# Altium PCB Reflex_InterfaceBoard_RevF_201603.PcbDoc
Units mil, origin at the board's own origin, x right, y up, seen from the top; angles counter-clockwise.
Board outline 4826.89 x 3773.99 mil, 4 copper layers (Top, Signal Layer 1, Signal Layer 2, Bottom), stack 61.2 mil thick; 34 components, 31 nets, 156 pads, 115 vias.
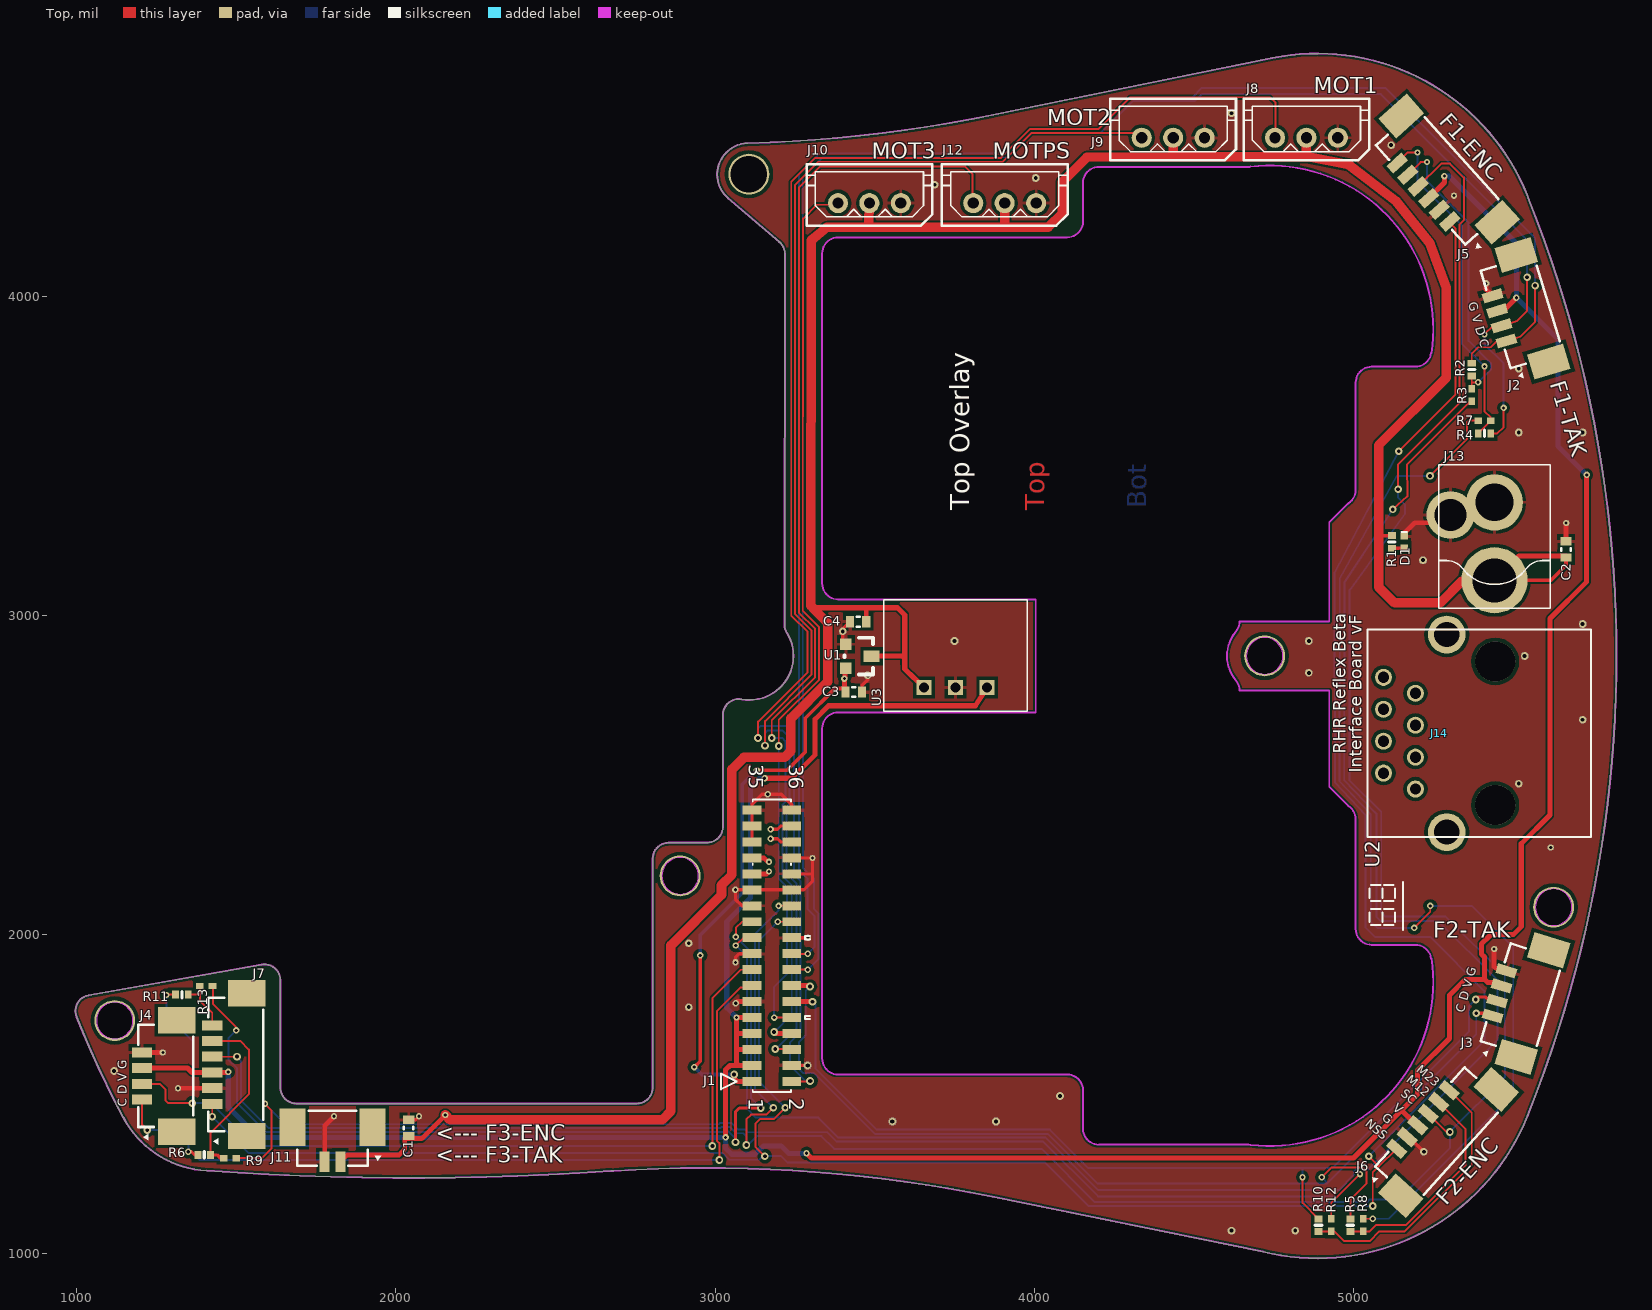
[diagram p0: Top view]
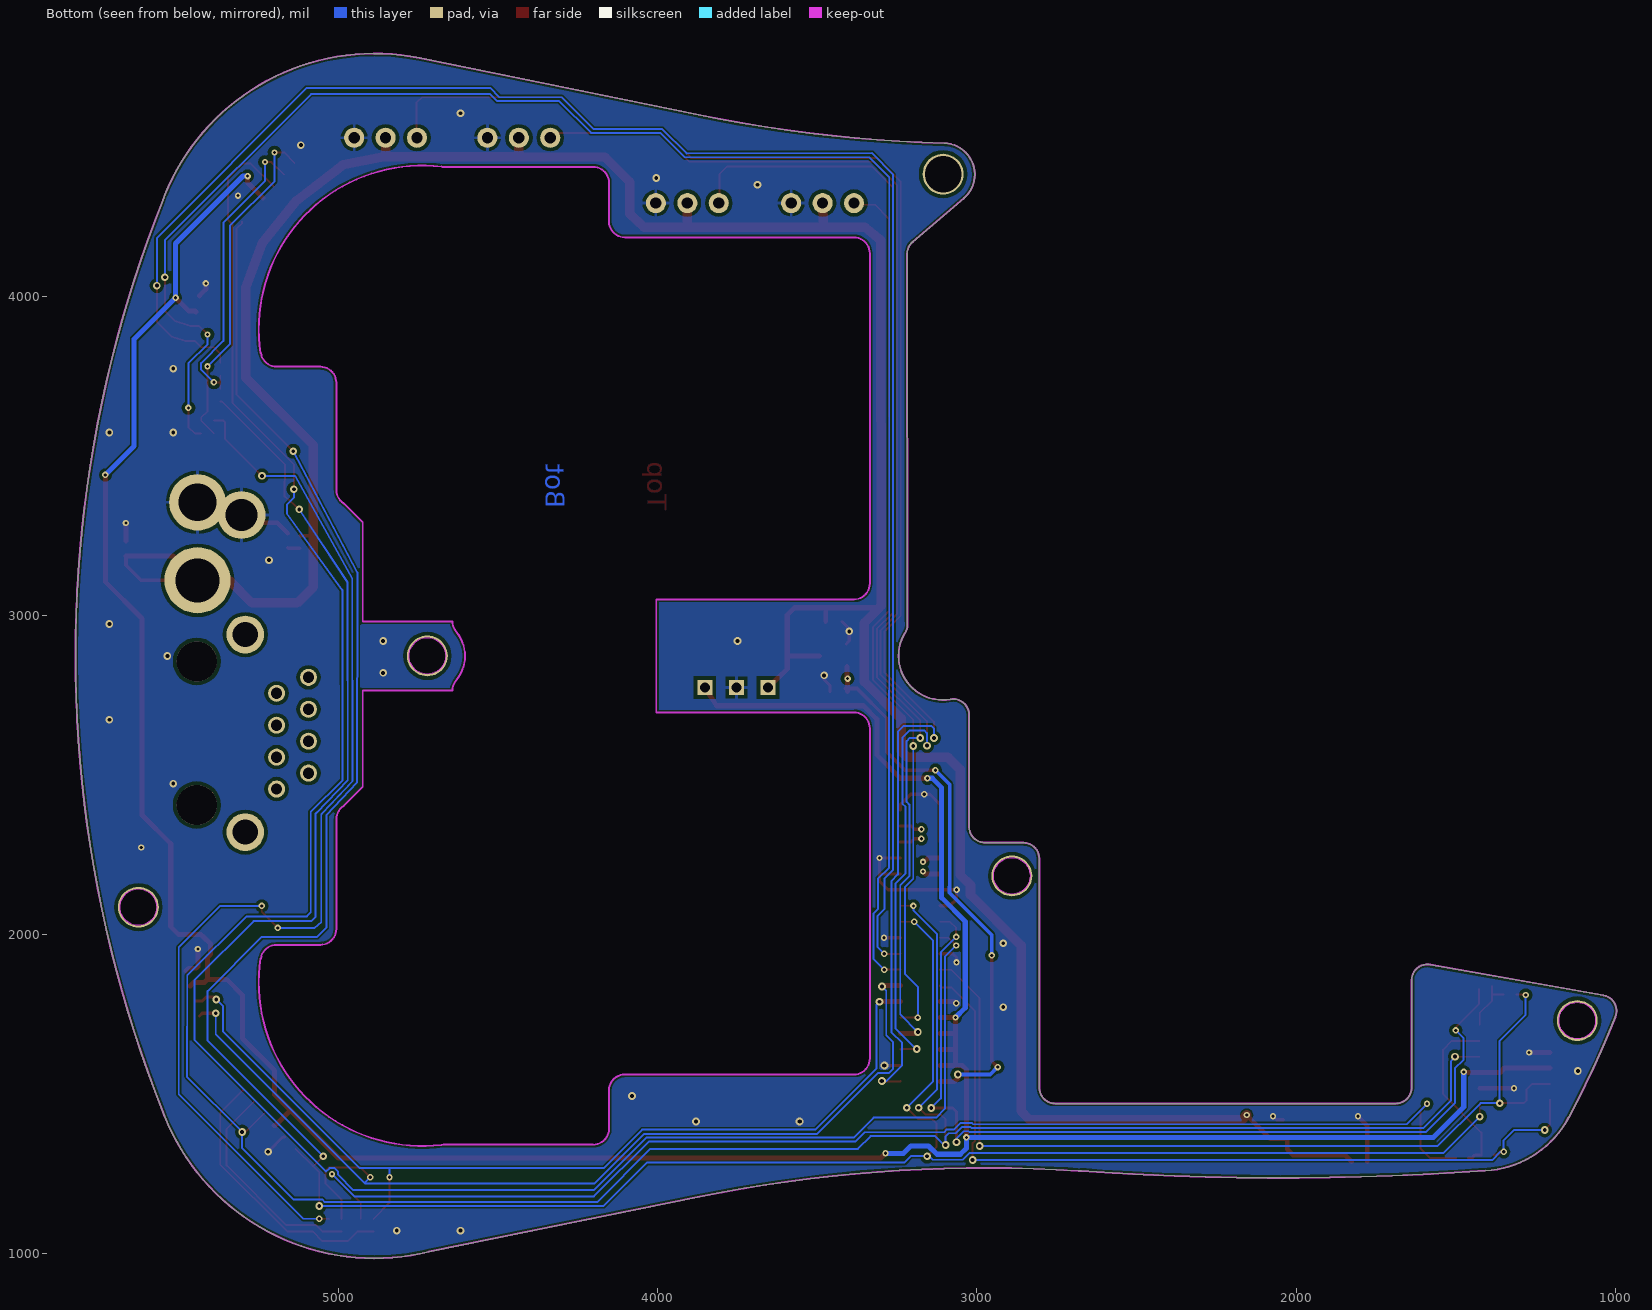
[diagram p1: Bottom view, seen from below]
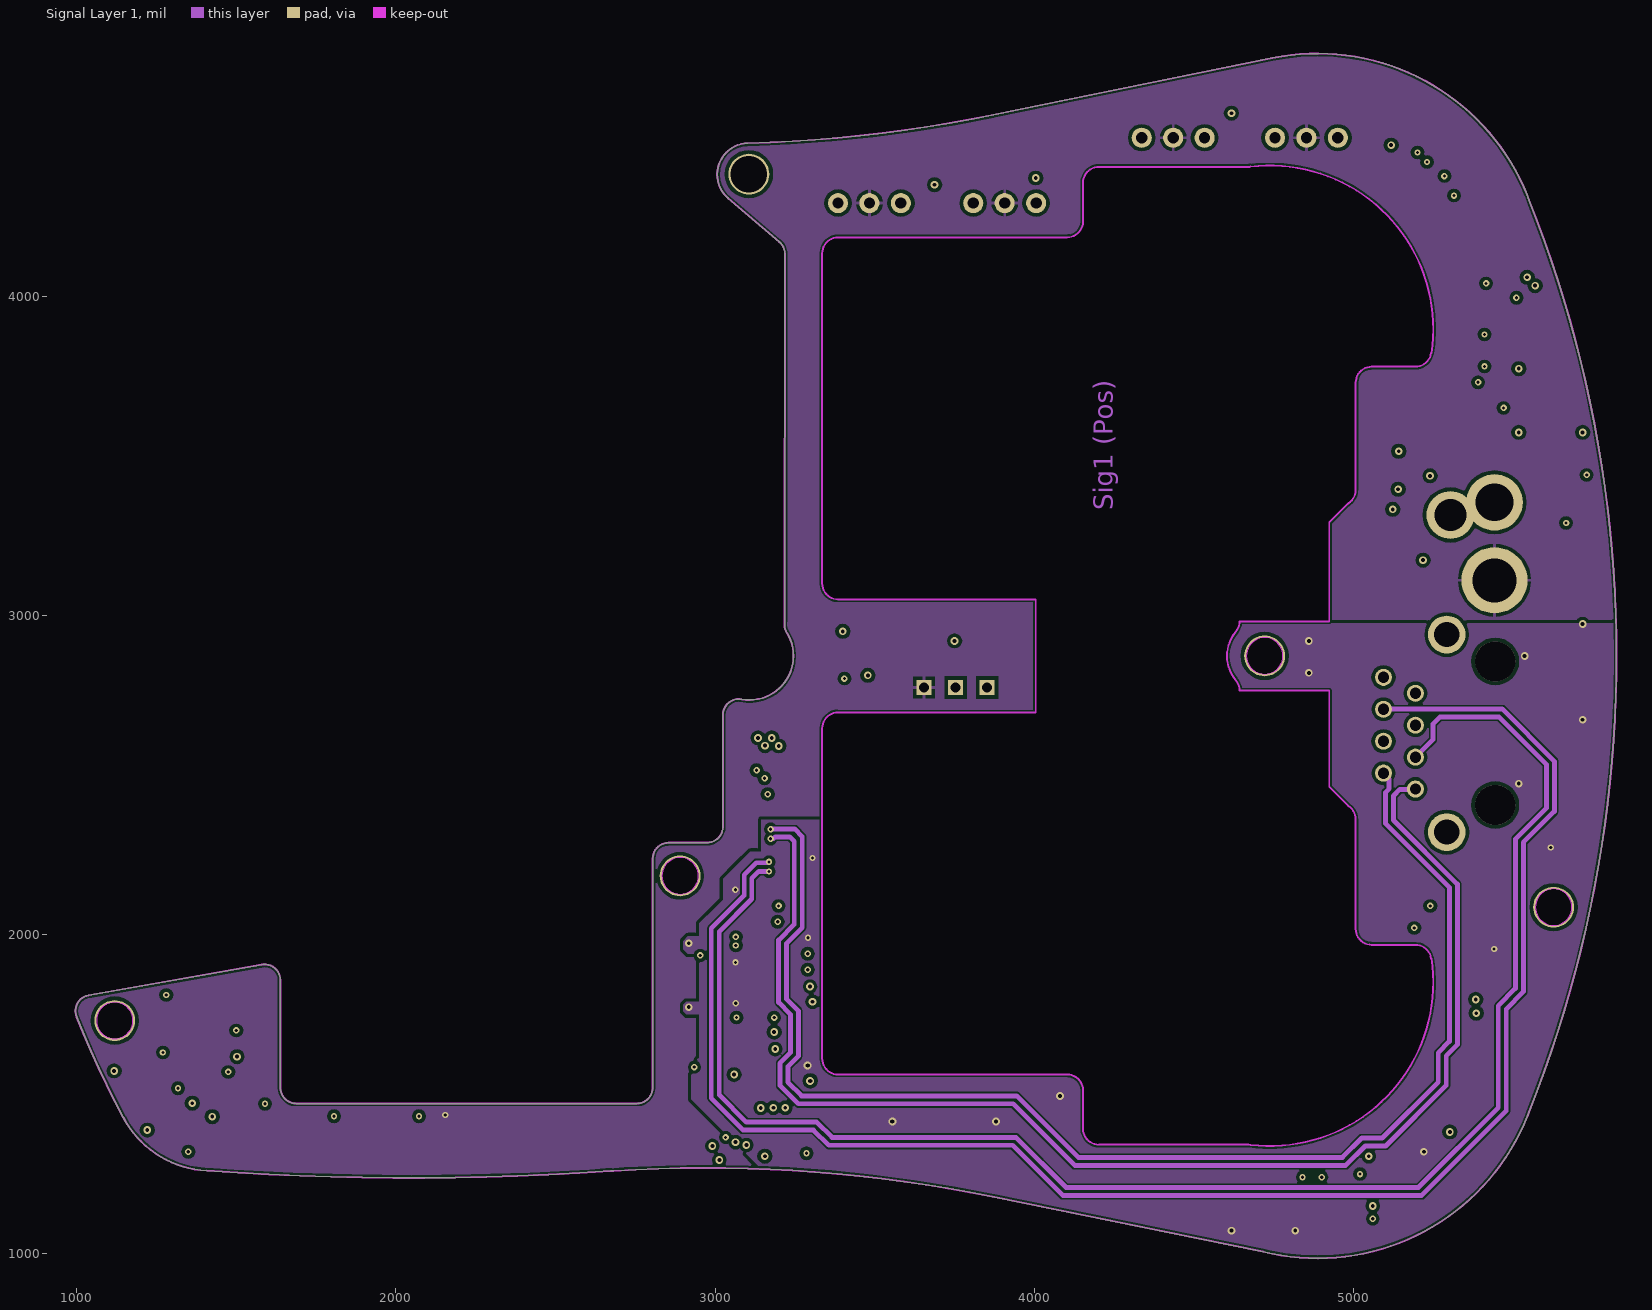
[diagram p2: Signal Layer 1]
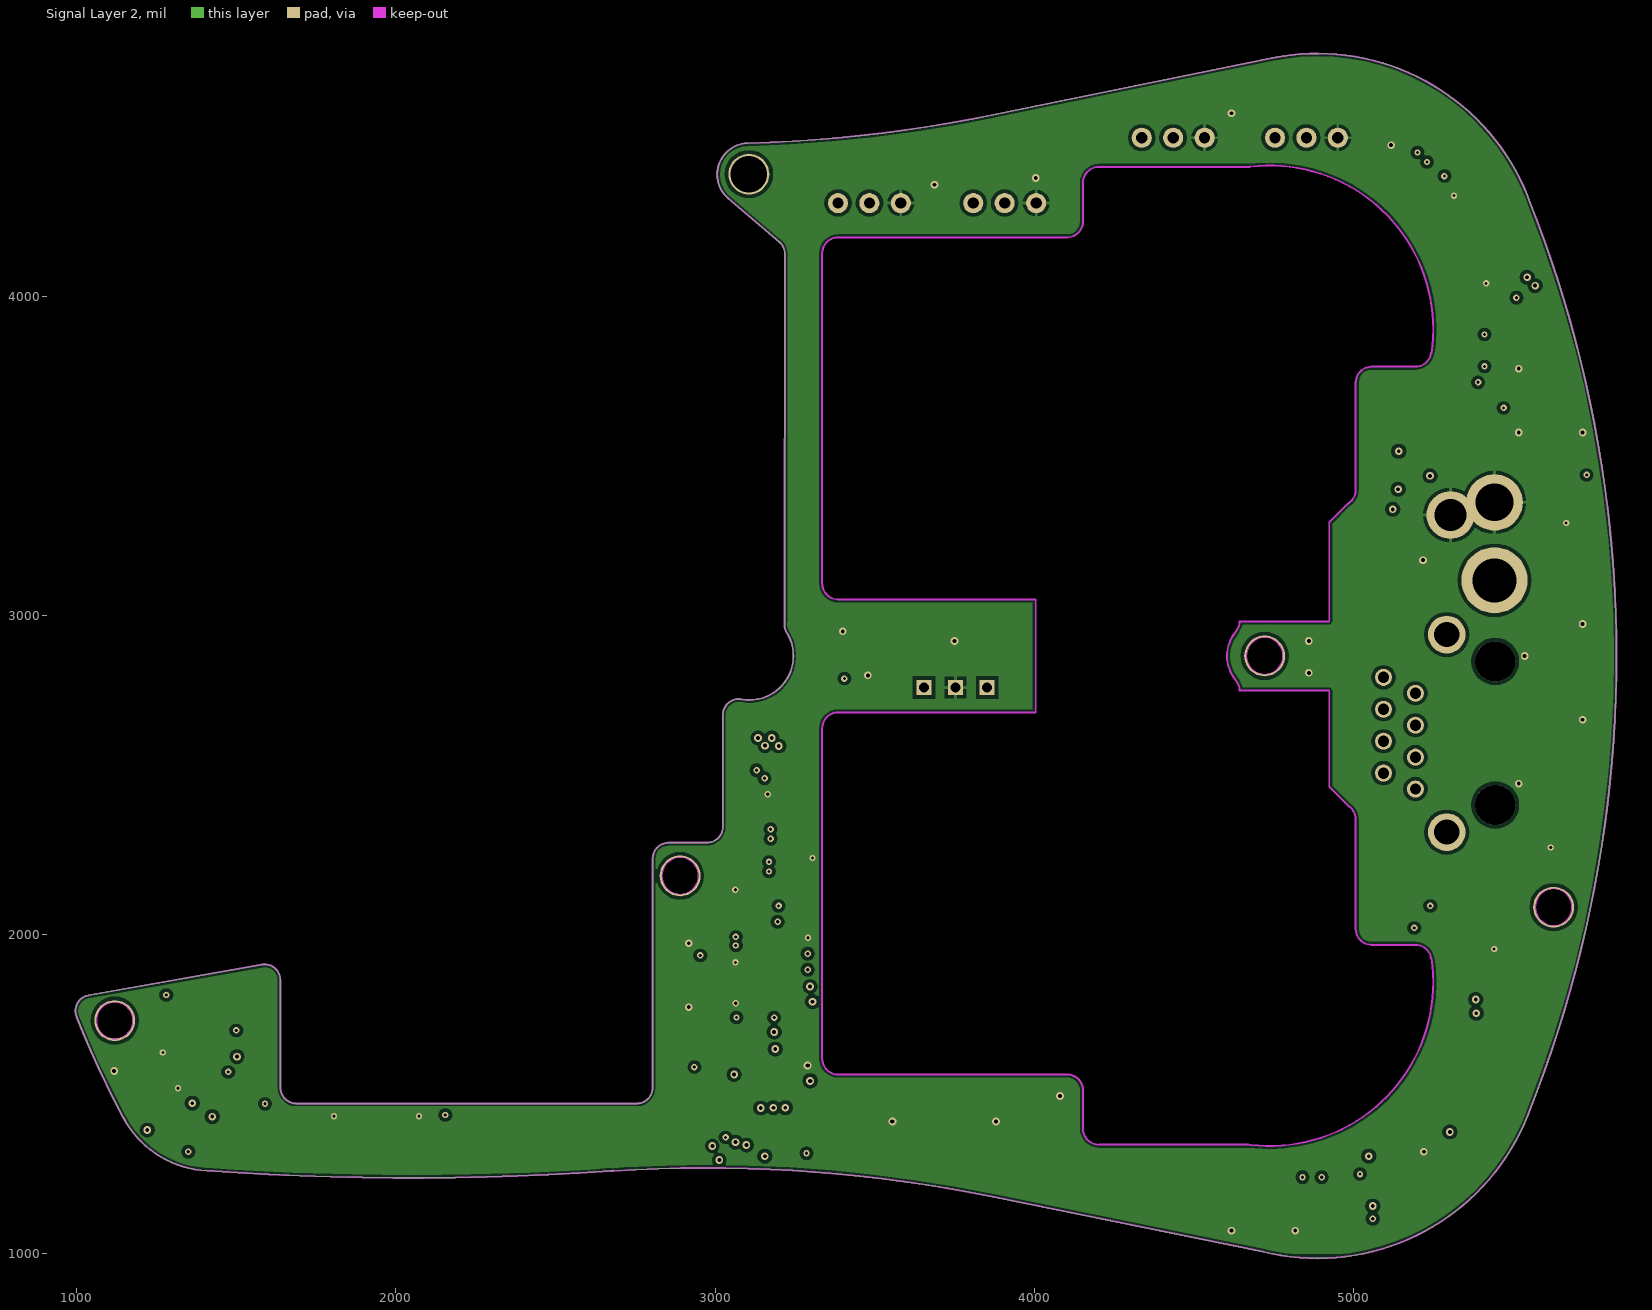
[diagram p3: Signal Layer 2]

## Layer stack, top to bottom
Top Solder: solder mask 0.4, Solder Resist, Dk 3.5
Top: signal copper 1.4
Dielectric 1: core 25, FR-4, Dk 4.8
Signal Layer 1: signal copper 1.417
Dielectric 3: prepreg 20.566, Dk 4.2
Signal Layer 2: signal copper 1.417
Dielectric 2: core 10, Dk 4.2
Bottom: signal copper 1.4
Bottom Solder: solder mask 0.4, Solder Resist, Dk 3.5

## Board outline
1146.61,1426.65 ccw(c1424.49,1575.02) 1407.69,1260.46 1407.72,1260.99 ccw(c2049.51,10214.05) 2673.2,1259.71 2682.03,1259.71 2682.09,1259.65 cw(c2975.08,-3209.35) 3867.87,1179.36 3867.95,1179.73 4716.04,1007.2 4715.95,1006.83 ccw(c4886.49,1695.01) 5544.22,1430.31 5549.54,1445.18 ccw(c1965.49,2873.02) 5548.87,4302.55 5548.86,4302.55 5543.86,4316.61 ccw(c4886.49,4051.02) 4746.35,4746.03 4746.48,4746.01 3871.92,4568.1 3872.82,4568.1 cw(c2977.15,8935.93) 3101.65,4478.95 ccw(c3104.65,4380.95) 3041.01,4306.37 3040.65,4305.95 3200.65,4169.95 3200.86,4170.2 cw(c3168.65,4131.96) 3218.65,4131.95 3218.65,4132.25 3217.66,2980 3217.48,2979.82 3217.48,2971.01 ccw(c3267.47,2971.02) 3224.85,2944.89 3225.15,2945.12 cw(c3107.48,2873.01) 3083.52,2737.11 3083.17,2737.25 ccw(c3074.48,2688.01) 3024.48,2688.01 3024.48,2338.01 cw(c2974.48,2338.01) 2974.48,2288.01 2854.48,2288.01 ccw(c2854.48,2238.01) 2804.48,2238.01 2804.48,1521.01 cw(c2754.48,1521.01) 2754.48,1471.01 1688.48,1471.01 cw(c1688.48,1521.01) 1638.48,1521.01 1638.48,1857.01 ccw(c1588.48,1857.01) 1579.8,1906.25 1580.48,1906.01 1037.48,1810.01 1037.8,1810.25 ccw(c1046.48,1761.02) 1000,1742.61 1000.14,1742.5 ccw(c3855.42,2873)
cut-out: 3335.48,1612.01 3335.48,2646.01 cw(c3385.48,2646.01) 3385.48,2696.01 4004.48,2696.01 4004.48,3050.01 3385.48,3050.01 cw(c3385.48,3100.01) 3335.48,3100.01 3335.48,4134.01 cw(c3385.48,4134.01) 3385.48,4184.01 4102.48,4184.01 ccw(c4102.48,4234.01) 4152.48,4234.01 4152.48,4355.01 cw(c4202.48,4355.01) 4202.48,4405.01 4670.48,4405.01 ccw(c4670.41,4455.01) 4676.4,4405.37 4676.86,4405.41 cw(c4737.49,3897.01) 5243.86,3821.34 5242.94,3821.62 cw(c5193.48,3829.02) 5193.48,3779.01 5056.48,3779.01 ccw(c5056.48,3729.01) 5006.48,3729.01 5006.48,3393.01 cw(c4956.49,3393) 4983.72,3351.08 4983.65,3351.25 4923.65,3291.25 4923.65,2981.25 4642.65,2981.25 4642.48,2981.01 cw(c4592.48,2981) 4630.79,2948.87 4631.09,2948.86 ccw(c4721.48,2873.01) 4630.96,2797.32 4630.79,2797.15 cw(c4592.48,2765.02) 4642.48,2765.01 4642.65,2764.25 4923.65,2764.25 4923.65,2463.25 4983.65,2403.25 4983.72,2402.95 cw(c4956.48,2361.02) 5006.48,2361.01 5006.48,2018.01 ccw(c5056.48,2018.01) 5056.48,1968.01 5193.48,1968.01 cw(c5193.48,1918) 5242.94,1925.4 5243.86,1925.69 cw(c4737.49,1850.02) 4676.86,1341.62 4676.4,1341.66 ccw(c4670.49,1292.01) 4670.48,1342.01 4202.48,1342.01 cw(c4202.48,1392.01) 4152.48,1392.01 4152.48,1512.01 ccw(c4102.48,1512.01) 4102.48,1562.01 3385.48,1562.01 cw(c3385.48,1612.01)
cut-out: 5683.48,2086.01 ccw(c5626.48,2086.01) 5569.48,2086.01 ccw(c5626.48,2086.01)
cut-out: 2947.48,2184.01 ccw(c2890.48,2184.01) 2833.48,2184.01 ccw(c2890.48,2184.01)
cut-out: 4778.48,2873.01 ccw(c4721.48,2873.01) 4664.48,2873.01 ccw(c4721.48,2873.01)
cut-out: 1176.48,1731.01 ccw(c1119.48,1731.01) 1062.48,1731.01 ccw(c1119.48,1731.01)

## Design rules (kind name [scope] priority, off if disabled: settings)
Clearance [All] p1: gap=6 except(11: SMDPad-Poly THPad-Poly Via-Poly Fill-Poly Poly-Poly)
Clearance "Clearance (Same Net)" [All] p2: gap=0
ComponentClearance ComponentClearance_Except [InComponent('J13') vs InComponent('J14')] p1: gap=0 collisioncheckmode=3 verticalgap=0 showdistances=FALSE
ComponentClearance [All] p2: gap=10 collisioncheckmode=3 verticalgap=10 showdistances=FALSE
DiffPairsRouting [All] p1: maxlimit=10 minlimit=6 mostfreqgap=10 toplayer_minwidth=10 toplayer_maxwidth=15 toplayer_prefwidth=15 midlayer1_minwidth=10 midlayer1_maxwidth=15 midlayer1_prefwidth=15 midlayer2_minwidth=10 midlayer2_maxwidth=15 midlayer2_prefwidth=15 bottomlayer_minwidth=10 bottomlayer_maxwidth=15 bottomlayer_prefwidth=15 maxuncoupledlength=500
HoleSize [All] p1: absolutevalues=TRUE maxlimit=150 minlimit=6 maxpercent=80.000 minpercent=20.000
HoleToHoleClearance mdViaViaSameLayer [All] p1: gap=8 allowstackedmicrovias=TRUE
HoleToHoleClearance [All] p2: gap=10 allowstackedmicrovias=TRUE
MinimumAnnularRing [All] p1: minimumring=5
MinimumSolderMaskSliver [All] p1: minsoldermaskwidth=2
PasteMaskExpansion mlMinCreamFrame [All] p1: expansion=0
PasteMaskExpansion [All] p2: expansion=0
PolygonConnect ThermalVias [IsVia] p1: connectstyle=Direct reliefconductorwidth=10 reliefentries=4 polygonreliefangle="90 Angle" airgapwidth=10
PolygonConnect [All] p2: connectstyle=Relief reliefconductorwidth=10 reliefentries=4 polygonreliefangle="90 Angle" airgapwidth=10
RoutingVias [All] p1: holewidth=10 width=20 viastyle="Through Hole" minholewidth=6 minwidth=16 maxholewidth=28 maxwidth=48
SilkToSilkClearance [All] p1 off: silktosilkclearance=10
SilkToSolderMaskClearance [IsPad] p1 off: minsilkscreentomaskgap=10 clearancetoexposedcopper=TRUE
SolderMaskExpansion mlMinStopFrame [All] p1: expansion=2
SolderMaskExpansion [All] p2: expansion=4
Width Width_1 [All] p1: maxlimit=100000 minlimit=6 preferedwidth=10
Width [All] p2: maxlimit=10 minlimit=10 preferedwidth=10
22 further rules are at their usual default settings.

## Classes and differential pairs
differential pair ETH_TX: +ETH_TX_P -ETH_TX_N
differential pair ETH_RX: +ETH_RX_P -ETH_RX_N

## Components (designator, comment, footprint, x,y, rotation, side; value= is the part's Value field where it differs from the comment)
C1 "Cap_0603_10uF" GENERIC_0603 2040,1420 r270 top
C2 "0.1uF 25V" Generic_0603 5665.5,3232.01 r270 top
C3 "1u" Generic_0603 3460,2760 r180 top
C4 "1u" Generic_0603 3473.46,2980 r180 top
D1 "LED White" 0402_LED_WHITE 5158.68,3230 r0 top
J1 "CLP-118-02-F-D" SAMTEC_CLP-118-02-F-D 3177.86,1865.39 r270 top locked
J2 "53398-0471" 53398-0410 5456.75,3930.19 r287 top
J3 "53398-0471" 53398-0410 5456.75,1815.84 r253 top
J4 "53398-0471" 53398-0410 1205.14,1557.36 r270 top
J5 "53398-0671" 53398-0610 5219.22,4325.27 r312 top locked
J6 "53398-0671" 53398-0610 5216.76,1420.89 r228 top
J7 "53398-0671" 53398-0610 1425.01,1593.05 r270 top
J8 "0022035035" 0022035035 4852.3,4496.2 r180 top
J9 "0022035035" 0022035035 4434.8,4496.08 r180 top
J10 "0022035035" 0022035035 3483.43,4291.49 r180 top
J11 "53398-0210" 53398-0210 1801.61,1288.65 r0 top
J12 "0022035035" 0022035035 3907.11,4291.49 r180 top
J13 "BRLJCK(DK:CP-044AH-ND)" BRLJCK(DK:CP-044AH-ND) 5441.36,3271.94 r180 top
J14 "" STEWART-CONNECTOR-SS-7188VS-A-NF-50 5443.64,2405.94 r90 top
R1 "3K" Generic_0402 5120,3230 r90 top
R2 "Res_0402_DNP" Generic_0402 5370,3770 r270 top
R3 "Res_0402_0" 0402 5370,3690 r90 top
R4 "Res_0402_DNP" Generic_0402 5410,3570 r180 top
R5 "Res_0402_DNP" Generic_0402 4990,1090 r270 top
R6 "Res_0402_DNP" Generic_0402 1400,1310 r0 top
R7 "Res_0402_0" 0402 5410,3610 r0 top
R8 "Res_0402_0" 0402 5030,1090 r270 top
R9 "Res_0402_0" 0402 1480,1300 r180 top
R10 "Res_0402_DNP" Generic_0402 4890,1090 r270 top
R11 "Res_0402_DNP" Generic_0402 1330,1812 r0 top
R12 "Res_0402_0" 0402 4930,1090 r270 top
R13 "Res_0402_0" 0402 1406,1839 r180 top
U1 "MCP1754ST-5002E/CB" SOT-23 3410,2910 r270 top
U3 "945-1394-5-ND(DIGIKEY)" 945-1394-5-ND(DIGIKEY) 3753.23,2874.21 r0 top locked

## Footprints (in the part's own frame and the unit in brackets; to place one, negate y for a bottom-side part, rotate by r counter-clockwise, add the part's x,y. Pads: shape width x height; smd on the part's side, far side on the other; paste and mask are expansions set on the pad)
0402 [mm] "Chip Capacitor, Body 1.0x0.5mm, IPC High Density"
  rect 0.6x0.5 smd: 1(-0.5,0) 2(0.5,0)
  body extent -0.55,-0.3 0.55,0.3, height 1.3
0402_LED_WHITE [mm] "White LED land pattern"
  rect 0.6x0.5 smd paste+0 mask+0: 1(0,-0.45) 2(0,0.45)
  silkscreen extent -0.2,0.8 0.2,0.8
945-1394-5-ND(DIGIKEY) [mil] "945-1394-5-ND(DIGIKEY)"
  rect 47.25x47.25 hole 31.5: GND(0,-100) VIN(-99,-100) VOUT(99,-100)
  silkscreen extent -225,-175 225,175
53398-0210 [mil] "53398-0210"
  rect 31.5x62.99 smd: 1(24.61,0) 2(-24.61,0)
  rect 82.68x118.11 smd: M1(125.39,108.27) M2(-125.39,108.27)
  silkscreen extent -111,-12 152,160, body extent -151,-8 151,158, height 185
53398-0410 [mil] "53398-0410"
  rect 31.5x62.99 smd: 1(73.82,0) 2(24.61,0) 3(-24.61,0) 4(-73.82,0)
  rect 82.68x118.11 smd: M1(174.61,108.27) M2(-174.61,108.27)
  silkscreen extent -160,-12 201,160, body extent -200,-3 200,163, height 185
53398-0610 [mil] "53398-0610"
  rect 31.5x62.99 smd: 1(123.03,0) 2(73.82,0) 3(24.61,0) 4(-24.61,0) 5(-73.82,0) 6(-123.03,0)
  rect 82.68x118.11 smd: M1(223.82,108.27) M2(-223.82,108.27)
  silkscreen extent -209,-12 251,160, body extent -249,-8 249,158, height 185
0022035035 [mil] "0022035035"
  round 62.99 hole 35.43: 1(98.43,0) 2(0,0) 3(-98.43,0)
  silkscreen extent -197,-122 197,71, body extent -195,-123 195,70, height 232
BRLJCK(DK:CP-044AH-ND) [mil] "BRLJCK(DK:CP-044AH-ND)"
  round 207 hole 138: TERM1(0,162)
  round 177 hole 118: TERM2(0,-82)
  round 150 hole 100: TERM3(138,-42.5)
  silkscreen extent -175,-200 175,250
Generic_0402 [mm] "Chip Resistor, Body 1.0x0.5mm, IPC Medium Density"
  rect 0.55x0.65 smd: 1(-0.5,0) 2(0.5,0)
  silkscreen extent 0,-0.25 0,0.25, body extent -0.52,-0.27 0.53,0.28, height 0.4
GENERIC_0603 [mm]
  rect 0.65x0.9 smd: 1(0,0) 2(1.3,0)
  silkscreen extent 0.53,-0.38 0.76,0.38, body extent -0.15,-0.4 1.45,0.4, height 0.35
Generic_0603 [mm]
  rect 0.65x0.9 smd: 1(0,0) 2(1.3,0)
  silkscreen extent 0.53,-0.38 0.76,0.38, body extent -0.15,-0.4 1.45,0.4, height 0.35
SAMTEC_CLP-118-02-F-D [mil] "SAMTEC_CLP-118-02-F-D"
  rect 28x59 smd mask+4: 1(325,-62) 2(325,62) 3(275,-62) 4(275,62) 5(225,-62) 6(225,62) 7(175,-62) 8(175,62) 9(125,-62) 10(125,62) 11(75,-62) 12(75,62) 13(25,-62) 14(25,62) 15(-25,-62) 16(-25,62) 17(-75,-62) 18(-75,62) 19(-125,-62) 20(-125,62) 21(-175,-62) 22(-175,62) 23(-225,-62) 24(-225,62) 25(-275,-62) 26(-275,62) 27(-325,-62) 28(-325,62) 29(-375,-62) 30(-375,62) 31(-425,-62) 32(-425,62) 33(-475,-62) 34(-475,62) 35(-525,-62) 36(-525,62)
  silkscreen extent -558,-160 358,120
SOT-23 [mil]
  rect 36x36 smd mask+0: 1(0,0) 2(75,0)
  rect 36x50 smd mask+0: 3(38,80)
  silkscreen extent -20,-5 95,85
STEWART-CONNECTOR-SS-7188VS-A-NF-50 [mm] "STEWART-CONNECTOR-SS-7188VS-A-NF-50"
  round 3.2 hole 3.2: 1(0,0) 1(11.43,0)
  round 1.35 hole 0.9: P$1(1.27,6.35) P$2(2.54,8.89) P$3(3.81,6.35) P$4(5.08,8.89) P$5(6.35,6.35) P$6(7.62,8.89) P$7(8.89,6.35) P$8(10.16,8.89)
  round 3 hole 2: P$9(-2.159,3.861) P$10(13.564,3.861)
  silkscreen extent -2.54,-7.62 13.97,10.16

## Part data
C1: "Capacitor"
C2: library part Cap_0603_0.1uF_25V, "Capacitor 0.1uF 0603 package"
C3 C4: library part Cap_0603_1uF, "Capacitor"
D1: library part LED_White_0402, "Surface mount LEDs"
J1: "SOCKET, 1.27MM, VERTICAL THT, 28WAY"
J2 J3 J4 J5 J6 J7: "HEADER"
J8 J9 J10 J12: library part MOLEX_0022035035, "CONN HEADER 3POS 2.5MM VERT TIN    Source:  http://www.digikey.com/product-detail/en/0022035035/WM18887-ND/403302 rfk_1850.pdf"
J11: library part 53398-0271, "HEADER"
J14: library part SS-7188VS-A-NF-50
R1: library part Res_0402_3.0K, "Resistor 3 Kohm"
R2 R4 R5 R6 R10 R11: "Resistor 0402 DNP"
R3 R7 R8 R9 R12 R13: "Resistor 0 ohm"
U1: library part LM50, "SOT-23 Single-Supply Centigrade Temperature Sensor   Vout = (10mV/°C x Temp °C) +5mmmV Source: http://cache.national.com/ds/LM/LM50.pdf"

## Free pads (board coordinates)
  round 128 hole 114: 1(1119.48,1731.01) 1(2890.48,2184.01) 1(3106,4382) 1(4721.48,2873.01) 1(5626.48,2086.01)

## Via types
v1: diameter 24/24/24/24 (per signal layer), hole 12, Top to Bottom, tented both sides, 55 vias
v2: diameter 20, hole 10, Top to Bottom, tented both sides, 54 vias
v3: diameter 25/25/25/25 (per signal layer), hole 13, Top to Bottom, tented both sides, 5 vias
v4: diameter 20/20/20/20 (per signal layer), hole 10, Top to Bottom, tented both sides, 1 vias

## Nets (pads, with @x,y where several pads share a name; then routed paths per layer and width w, separated by ;. In a path a pad name is that pad's centre, name@x,y a point inside that pad or via, vN(x,y) a via of type N, cw(c..) or ccw(c..) an arc to the next point about the centre after c; other vN are vias at no path point)
3V3: J1.3 J1.5 J1.7 J1.9 J2.3 J3.3 J4.3 J5.3 J6.3 J7.3 U3.VOUT | length 10284.8
  Top w16: J4.3 1347.53,1581.97 1361.48,1568.01 1424.59,1568.01 J7.3 1473.44,1568.44 v2(1475,1570) ; v2@1473.48,1568.01 v2@1475.11,1568.1 ; v2(3032.99,1365.01) 3032.99,1576.99 3046.39,1590.39 3073.61,1590.39 ; 3068.39,1690.39 J1.7 ; 3069.61,1640.39 J1.5 ; J1.3 3073.61,1590.39 ; J1.9 v2(3067,1740.39) 3067,1597 3073.61,1590.39 ; v2(3155,2490) 3240,2490 3313.48,2563.48 3313.48,2675.01 3355.48,2717.01 3815.67,2717.01 U3.VOUT ; v2(3286.47,1315) 3301.47,1300 5000,1300 5150,1450 ; J6.3@5200.9,1402.6 J6.3 5197.4,1402.6 5150,1450 ; J5.3 5284.48,4355.78 v2(5284.48,4376.01) ; J2.3@5445.83,3950 J2.3 5468.72,3953.72 v2(5510,3995) ; J3.3 5453.32,1850 5420,1850 5410,1860 ; v2(5730,3440) 5730,3105 5615,2990 5615,2375 5525,2285 5525,2025 5500,2000 5430,2000 5424,1994 5423.85,1994 5401,1971.15 5401,1938.85 5410,1929.85 5410,1860 ; 5150,1450 5200,1500 5200,1575 5300,1675 5300,1810 5350,1860 5410,1860
  Bottom w16: v2(1475,1570) 1475,1460 1570,1365 v2(3032.99,1365.01) 3032.99,1331.05 3052.04,1312 3125.23,1312 3151.23,1338 3206.85,1338 3229.85,1315 v2(3286.47,1315) ; v2(3067,1740.39) 3036.48,1770.91 3036.48,2041.48 3110.48,2115.48 3110.48,2460.48 3140,2490 v2(3155,2490) ; v2(5284.48,4376.01) 5298.99,4376.01 5510,4165 v2(5510,3995) 5640,3865 5640,3530 v2(5730,3440)
5V: C3.2 J1.1 U1.2 | length 1868.3
  Top w12: v2(2935,1585) 2953.48,1603.48 v2(2953.48,1935) ; v1(3059.48,1561.75) 3059.48,1550.52 3059.48,1547.75 3066.48,1540.75 3115.5,1540.75 J1.1 ; v2(3130,2515) 3225,2515 3282.48,2572.48 3282.48,2678.01 3375.91,2771.44 C3.2@3411.57,2771.44 ; C3.2@3406.56,2776.45 U1.2@3406.56,2835.8
  Top w15: C3.2@3405,2761.54 v2(3405,2801.9) 3406.55,2803.45 U1.2@3406.55,2840.8
  Top w16: v1@3059.48,1550.52 3069.61,1540.39 J1.1
  Bottom w12: v2(2935,1585) 2958.25,1561.75 v1(3059.48,1561.75) ; v2(2953.48,1935) 2953.48,1998.48 3085,2130 3085,2130.67 3085.61,2131.28 3085.61,2149.5 3085,2150.11 3085,2470 v2(3130,2515)
ETH_RX_N: J1.34 J14.P$2 | length 4314.4
  Top w10: v2(3174,2330.39) 3195.36,2330.39 3205.36,2340.39 J1.34
  Top w16: J14.P$2 J14.P$2@5098.65,2500.94
  Signal Layer 1 w15: v2(3174,2330.39) 3174.61,2331 3249,2331 3273,2307 3273,2021.64 3224,1972.64 3224,1798 3261,1761 3261,1619.64 3228,1586.64 3228,1538 3271,1495 3944.36,1495 4137.36,1302 4965,1302 5026,1363 5090,1363 5265,1538 5265,1630.36 5300,1665.36 5300,2148 5100,2348 5100,2445.36 5111.32,2456.68 5111.32,2488.26 J14.P$2
ETH_RX_P: J1.32 J14.P$1 | length 4342.4
  Top w10: v2(3174,2300.39) 3195.36,2300.39 3205.36,2290.39 J1.32
  Signal Layer 1 w15: v2(3174,2300.39) 3182.89,2300.39 3188.5,2306 3234,2306 3248,2292 3248,2032 3199,1983 3199,1787.64 3236,1750.64 3236,1630 3203,1597 3203,1527.64 3260.64,1470 3934,1470 4127,1277 4975.36,1277 5036.36,1338 5100.36,1338 5290,1527.64 5290,1620 5325,1655 5325,2158.36 5125,2358.36 5125,2435 5145,2455 5192.7,2455 J14.P$1
ETH_TX_N: J1.29 J14.P$6 | length 5384.3
  Top w15: J1.29 3152.86,2240.39 3165.36,2227.89 v2(3169,2227.89)
  Top w16: J14.P$6 J14.P$6@5095.34,2704.25
  Signal Layer 1 w15: v2@3169,2225 3128.64,2225 3091,2187.36 3091,2123 2988,2020 2988,1487.64 3087.64,1388 3308,1388 3356,1340 3932,1340 4089,1183 5213.36,1183 5478,1447.64 5478,1767 5532,1821 5532,2289 5629,2386 5629,2543.36 5465.36,2707 5094.7,2707 J14.P$6
ETH_TX_P: J1.27 J14.P$3 | length 5197.4
  Top w15: J1.27 3161.5,2190.39 v2(3169,2197.89)
  Signal Layer 1 w15: v2(3169,2197.89) 3136.89,2197.89 3115,2176 3115,2111.64 3013,2009.64 3013,1498 3098,1413 3318.36,1413 3366.36,1365 3942.36,1365 4099.36,1208 5203,1208 5453,1458 5453,1777.36 5507,1831.36 5507,2299.36 5604,2396.36 5604,2533 5455,2682 5271,2682 5249,2660 5249,2611.3 J14.P$3
  Bottom w16: J14.P$3 J14.P$3@5196.34,2553.25
GND: C1.1 C2.1 C3.1 C4.2 D1.2 J1.4 J1.11 J1.17 J1.20 J1.23 J1.25 J1.26 J1.28 J1.30 J1.31 J1.33 J1.35 J1.36 J2.4 J3.4 J4.4 J5.2 J6.2 J7.2 J8.3 J9.3 J10.3 J11.2 J12.3 J13.TERM2 J13.TERM3 U1.1 U3.GND | length 2010.8
  Top w10: C1.1 2061.47,1420 v2(2072.48,1431.01) ; v2(3064,1913) 3064,1929 3075.39,1940.39 J1.17 ; J1.23 3084.61,2090.39 3063.61,2111.39 v2(3063.61,2140.39) J1.25 J1.26 3278.39,2140.39 3305,2167 v2(3305,2240) ; J1.31 J1.33 J1.35 3115.86,2408.86 3147,2440 v2(3165,2440) 3207,2440 3239.86,2407.14 J1.36 ; J1.4 3289.22,1590.39 v3(3290,1589.61) ; J1.20 3290.61,1990.39 v2(3291,1990) ; J1.28 3305,2190.39 ; J1.30 v2@3305,2240.39 ; U1.1 3400,2920 v1(3400,2950) 3400,2957.72 C4.2 ; C3.1 3460,2780 3478.48,2798.48 v1(3478.48,2812.01) ; J6.2 5173.97,1366.03 v1(5220,1320)
  Top w15: J4.4 v2@1270.31,1631.18 ; v2(1317.48,1519.01) J7.2@1424.79,1519.01 ; J11.2 1777,1402 v2@1806.48,1431.48 ; v2(3065,1785) 3070.39,1790.39 J1.11 ; D1.2@5158.43,3257.06 5191.37,3290 5278.92,3290 J13.TERM3 ; v2(5415,4040) 5415,4020.95 J2.4 ; v2(5440,1955) 5440,1900 5445,1895 5469.77,1895 J3.4 ; C2.1 v2(5665.5,3289.5)
  other v1: 4617.48,1073.01 4817.48,1073.01 1117.48,1573.01 2917.48,1773.01 2917.48,1973.01 5517.48,2473.01 5717.48,2673.01 4860,2820 5535.59,2873.01 3750,2920 4860,2920 5717.48,2973.01 5217.48,3173.01 5517.48,3573.01 5717.48,3573.01 5517.48,3773.01 3687.48,4349.01 4004.48,4370.01 5117.48,4473.01 4617.48,4573.01
  other v2: 1806.48,1431.01 1270.48,1631.01 5314.48,4315.01
  other v3: 3555,1415 3880,1415 4080,1495
  other v4: 5617.48,2273.01
I2C1_SCL: J1.18 J2.1 R2.1 | length 5662.5
  Top w6: J1.18 3240.25,1940 v2(3290,1940) ; R2.1 5370,3820 5390,3840 5430,3840 5449.59,3859.59 J2.1 5523.48,3874.01 5568.48,3919.01 v1(5568.48,4033.01)
  Bottom w6: v2(3290,1940) 3311,1961 3311,2059 3290,2080 3290,2175 3262.48,2202.52 3262.48,4380.01 3328.48,4448.01 3909.48,4447.01 3985.48,4523.01 4200.48,4523.01 4300.48,4623.01 4495.48,4623.01 4524.48,4652.01 5098.48,4652.01 5568.48,4182.01 v1(5568.48,4033.01)
I2C1_SDA: J1.16 J2.2 R4.1 | length 5878.2
  Top w6: J1.16 3289.61,1890.39 v2(3290,1890) ; v2(5410,3880) 5436.66,3906.66 J2.2 5511.48,3922.01 5543.48,3954.01 v1(5543.48,4059.01) ; R4.1 5450,3570 5470,3590 v2(5470,3650)
  Bottom w6: v2(3290,1890) 3323.48,1923.48 3323.48,2066.52 3310,2080 3310,2175 3275,2210 3275,2764.49 3274.48,2765.01 3274.48,4372.01 3336.48,4435.01 3915.48,4435.01 3991.48,4511.01 4208.48,4511.01 4308.48,4611.01 4502.48,4611.01 4524.48,4633.01 5085.48,4633.01 5543.48,4175.01 v1(5543.48,4059.01) ; v2(5410,3880) 5410,3850 5470,3790 v2(5470,3650)
I2C2_SCL: J1.14 J3.1 R5.1 | length 3269.5
  Top w6: v2(4900,1240) 4930,1270 5030,1270 5040,1260 5040,1220 4990,1170 R5.1
  Top w10: v1(5384.22,1754) 5426.41,1754 J3.1
  Top w16: J1.14 3294.57,1840.39 v1(3297.48,1837.48)
  Bottom w6: v1(3297.48,1837.48) 3284,1824 3284,1685 3263,1664 3263,1578.97 3274.97,1567 3309,1567 3499.99,1376.01 4042.48,1376.01 4198.49,1220 4915.47,1220 ; v2(4900,1240) 4915.47,1224.53 4915.47,1220 ; v1(5384.22,1754) 5384.22,1688.75 4915.47,1220
I2C2_SDA: J1.12 J3.2 R10.1 | length 2996.4
  Top w6: v2(4840,1240) 4840,1159.69 R10.1
  Top w10: v1(5382.47,1797) 5390.47,1805 5413,1805 5425.69,1792.31 J3.2
  Top w16: J1.12 3304.61,1790.39 v1(3305,1790)
  Bottom w6: v1(3305,1790) 3315,1780 3315,1580 3505.99,1389.01 4048.48,1389.01 4168.48,1269.01 4840,1269.01 ; v2(4840,1240) 4840,1269.01 ; v1(5382.47,1797) 5361,1775.53 5361,1696.53 4933.48,1269.01 4840,1269.01
I2C3_SCL: J1.13 J4.1 R6.1 | length 2602.1
  Top w6: J4.1 1205.14,1404.36 v1(1221.48,1388.01) ; v1(3013.48,1294.01) 3013.48,1347.01 3005.48,1355.01 3005.48,1760.48 3080,1835 3110.47,1835 J1.13
  Top w10: v2(1350,1320) 1360,1320 1370,1310 R6.1
  Bottom w6: v1(1221.48,1388.01) 1318.01,1388.01 1350,1356.02 v2(1350,1320) 1360,1320 1385.99,1294.01 v1(3013.48,1294.01)
I2C3_SDA: J1.15 J4.2 R11.1 | length 2914.1
  Top w6: J4.2 1260.74,1532.75 1278.48,1515.01 1278.48,1481.01 1287.48,1472.01 v1(1362.48,1472.01) ; v2(1281,1811) 1282,1812 R11.1 ; v1(2991.48,1338.01) 2991.48,1801.48 3080,1890 3115.47,1890 J1.15
  Bottom w6: v2(1281,1811) 1281,1749 1362.48,1667.52 v1(1362.48,1472.01) 1422.48,1472.01 1556.48,1338.01 v1(2991.48,1338.01)
MISO: J1.21 R13.1 | length 2849.6
  Top w6: R13.1@1427,1830 1427,1783 1500,1710 v2(1500,1700) ; v2(3065,1993) 3065,2021 3084.39,2040.39 J1.21
  Top w10: v1@3064,1360 3064,1445 3076,1457 v1(3143,1457)
  Bottom w6: v2(1500,1700) 1476.48,1676.48 1476.48,1607.01 1502.48,1581.01 1502.48,1472.01 1592.49,1382 3023.11,1382 ; 3025.84,1384.23 3040.73,1384.24 3063.99,1361.01 v1(3064,1350) ; v2(3065,1993) 3113,1945 3113,1487 v1(3143,1457)
MOSI: J1.19 R3.1 | length 5710
  Top w6: v2(3065,1966) 3089.39,1990.39 J1.19 ; v1(5122.48,3332.01) 5168.48,3373.01 5167.48,3473.01 5364.78,3670.32 R3.1
  Bottom w6: v2(3065,1966) 3100,1931 3100,1455 3127.99,1427.01 3323.48,1427.01 3386.48,1364.01 4035.48,1364.01 4199.49,1200 4953.03,1200 5001,1247.97 5001,1257.87 5012.13,1269 5027.87,1269 5039,1257.87 5039,1259 5451.36,1671.36 5451.36,1856.54 5265.65,2042.25 5085.65,2042.25 5071.65,2056.25 5071.65,2379.25 5068.48,2382.42 4970.65,2483.25 4971.65,3104.18 v1(5122.48,3332.01)
MOSI1-2: R7.1 R8.1 | length 3478.2
  Top w6: R8.1 5030.32,1110 v2(5060,1110) ; v2(5190,2021.25) 5240,2071.25 v2(5240,2090) ; v1(5239.48,3437.01) 5355.48,3553.01 5355.48,3605.48 5360,3610 R7.1
  Bottom w6: v2(5060,1110) 5110,1110 5500,1500 5500,1960 5370,2090 v2(5240,2090) ; v2(5190,2021.25) 5074.65,2021.25 5053.65,2038.25 5053.65,2371.58 5052.48,2378.42 4955.65,2481.25 4956.65,3115.18 5135.48,3437.01 v1(5239.48,3437.01)
MOSI2-3: R9.1 R12.1 | length 4030.6
  Top w6: R9.1 1580,1300 1610,1330 1610,1450 v2(1590,1470) ; R12.1 4930,1160 v2(5020,1250)
  Bottom w6: v2(1590,1470) 1654,1406 3011.91,1406 3015.39,1409.49 3051.51,1409.49 3071,1390 3094,1390 3103,1381 3351.49,1381 3380.48,1352.01 4027.48,1352.01 4199.49,1180 4950,1180 v2(5020,1250)
NetD1_1: D1.1 R1.1 | length 39.5
  Top w10: R1.1 5156.71,3210.32 D1.1
NetJ5_5: J5.5 R2.2 R3.2 | length 926.7
  Top w6: J5.5 5170.13,4380.13 5210,4420 v2(5230,4420) ; R3.2 5370,3730 ; R2.2 5370,3730 ; v2(5390,3730) 5370,3730
  Bottom w6: v2(5230,4420) 5230,4360 5360,4230 5360,3860 5430,3790 5430,3770 v2(5390,3730)
NetJ5_6: J5.6 R4.2 R7.2 | length 1068.3
  Top w6: J5.6 5170.2,4450 v2(5200,4450) ; R4.2 5429.69,3609.37 R7.2 5429.69,3620.31 5410,3640 v2(5410,3780)
  Bottom w6: v2(5200,4450) 5200,4360 5340,4220 5340,3850 v2(5410,3780)
NetJ6_5: J6.5 R5.2 R8.2 | length 679.1
  Top w6: R5.2 R8.2 5050.31,1070.31 5070,1090 5163.03,1090 5350,1276.97 5350,1391.9 J6.5
NetJ6_6: J6.6 R10.2 R12.2 | length 853.7
  Top w6: R10.2 R12.2 4939.69,1070.31 4970,1040 5050,1040 5080.31,1070.31 5160.31,1070.31 5370,1280 5370,1441.4 J6.6
NetJ7_5: J7.5 R6.2 R9.2 | length 550.7
  Top w6: R6.2 1420,1310.32 1420,1380 1540,1500 1540,1640 1513.13,1666.87 J7.5
  Top w10: R6.2 1440,1310 1450,1300 R9.2
NetJ7_6: J7.6 R11.2 R13.2 | length 175.6
  Top w6: R11.2 1386.31,1812 ; R13.2 1386.31,1812 ; J7.6 1425.01,1754.99 1386.31,1793.69 1386.31,1812
NSS: J1.22 J5.1 J6.1 J7.1 | length 8471.5
  Top w6: v1(1425.01,1430) J7.1 ; v1(3156,1306) 3126,1336 3126,1408 3141,1423 3185.1,1423 v1(3220,1457.9) ; v2(3196,2040.39) J1.22 ; v1(5047.48,1306.01) 5079.24,1274.26 ; v1(5060,1150) 5060,1255.03 5079.24,1274.26 ; J6.1 5079.24,1274.26 ; v1(5141.48,3514.01) 5319.48,3692.01 5319.48,4211.01 5301.54,4228.96 J5.1
  Bottom w6: v1(1425.01,1430) 1539,1316.01 3023.99,1316.01 3045,1295 3139,1295 3151,1307 3206,1307 3226.99,1286.01 4033.99,1286.01 4170,1150 v1(5060,1150) ; v2(3196,2040.39) 3138,1982.39 3138,1539.9 v1(3220,1457.9) ; v1(5047.48,1306.01) 5409.48,1668.01 5409.48,1823.42 5239.65,1993.25 5066.65,1993.25 5037.65,2022.25 5037.65,2374.25 5037.48,2374.42 4941.65,2477.25 4940.65,3134.18 v1(5141.48,3514.01)
SCLK: J1.24 J5.4 J6.4 J7.4 | length 9017.4
  Top w6: J7.4@1425.01,1617.65 1502.12,1617.65 v1(1502.48,1618.01) ; v1@3098,1346 3098,1421 3113,1436 3160.48,1436 v1(3182.48,1458) ; v2@3198.8,2090.39 J1.24 ; v1(5139.48,3395.01) 5139.48,3473.01 5331.48,3665.01 5331.48,4224.01 5345.48,4238.01 5345.48,4371.01 5301.48,4415.01 5274.48,4415.01 5203.02,4343.55 J5.4 ; J6.4 5290.39,1382.01 v1(5301.48,1382.01)
  Bottom w6: v1(1502.48,1618.01) 1504.48,1618.01 1515.48,1602.01 1515.48,1480.01 1601.49,1394 3016.88,1394 3020.36,1397.49 3046.21,1397.49 3065.7,1378 3088,1378 3098,1368 3098,1336 3131,1369 3333,1369 3372.99,1329.01 4022.48,1329.01 4189.49,1162 5042.3,1162 5051.3,1171 5141,1171 5301.48,1331.48 v1(5301.48,1382.01) 5474.48,1555.01 5473.48,1872.25 5287.48,2057.25 5098.65,2057.25 5086.48,2069.42 5086.48,2384.42 4986.65,2484.25 4987.65,3079.18 5161.48,3319.01 5161.48,3347.01 5139.48,3369.01 v1(5139.48,3395.01) ; v1(3182.48,1458) 3125,1515.48 3125,2002 3198.8,2075.8 v2(3198.8,2090.2)
  other v1: 3098,1341
UART3_DATA_B: J1.2 J8.1 | length 4936.5
  Top w6: v1(3134.48,2616.01) 3134.48,2667.01 3289.48,2822.01 3289.48,2948.01 3238.48,2999.01 3238.48,4358.01 3313.48,4433.01 3895.48,4433.01 3985.48,4523.01 4200.48,4523.01 4300.48,4623.01 4737.89,4623.01 4755.65,4605.25 4755.65,4497.98 J8.1 ; J1.2@3238.5,1541.75 J1.2 v3@3298,1540.39
  Bottom w6: v1(3134.48,2616.01) 3134.48,2646.01 3142.48,2654.01 3228.48,2654.01 3247.48,2635.01 3247.48,2188.52 3268,2168 3268,1695 3234,1661 3234,1591 3283,1542 v3(3298,1542)
UART4_DATA_B: J1.6 J9.1 | length 4195.7
  Top w6: v1(3156.48,2592.01) 3156.48,2669.01 3301.48,2814.01 3301.48,2953.01 3250.48,3004.01 3250.48,4349.01 3322.48,4421.01 3901.48,4421.01 3991.48,4511.01 4321.44,4511.01 J9.1 ; v1@3190.48,1641.75 3238.5,1641.75 J1.6
  Bottom w6: v1(3156.48,2592.01) 3156.48,2631.01 3165.48,2640.01 3210.48,2640.01 3233.48,2617.01 3233.48,2410.01 3223.48,2400.01 3223.48,2191.52 3255,2160 3255,1706.27 v1@3190.48,1641.75
  other v1: 3188.48,1641.75
UART5_DATA_B: J1.8 J12.1 | length 3535.2
  Top w6: v1(3177.48,2616.01) 3177.48,2671.01 3313.48,2807.01 3313.48,2958.01 3262.48,3009.01 3262.48,4340.01 3328.48,4406.01 3782.89,4406.01 3806.65,4382.25 3806.65,4287.52 J12.1
  Top w16: v1(3185,1695) 3189.61,1690.39 J1.8
  Bottom w6: v1(3177.48,2616.01) 3210.48,2616.01 3220.48,2606.01 3220.48,2416.01 3211.48,2407.01 3211.48,2183.52 3240,2155 3240,1750 v1(3185,1695)
UART6_DATA_B: J1.10 J10.1 | length 2788.6
  Top w6: v2(3185,1740) 3185.39,1740.39 J1.10 ; v1(3199.48,2591.01) 3199.48,2673.01 3325.48,2799.01 3325.48,2963.01 3274.48,3014.01 3275.48,4227.01 3275.48,4243.08 3318.65,4286.25 3381.24,4286.25 J10.1
  Bottom w6: v2(3185,1740) 3185,1836.27 3225,1876.27 3225,2150 3199.48,2175.52 v1(3199.48,2591.01)
VCC: C1.2 C2.2 C4.1 J8.2 J9.2 J10.2 J11.1 J12.2 J13.TERM1 R1.2 U1.3 U3.VIN | length 9535.5
  Top w10: 5078.48,3250 5078.79,3249.69 R1.2
  Top w12: J13.TERM1 5618.41,3109.94 5665.48,3157.01 C2.2@5665.48,3186.33
  Top w15: J11.1 1847.57,1310 2010,1310 2027.96,1327.96 2027.96,1361.03 2081.03,1361.03 v2(2155,1435) ; C4.1 3473.46,3020.55 ; J13.TERM1 5517.77,3186.35 C2.2@5665.5,3186.35
  Top w16: 3299.48,3031.01 3300.48,3024.01 3305.48,3024.01 3571.48,3024.01 3594.23,3001.27 3594.23,2831.64 ; U1.3@3493.17,2873.2 3592.04,2873.2 3594.23,2831.64 ; U3.VIN 3594.23,2831.64
  Top w30: v2(2155,1435) 2170,1420 2834.47,1420 2861.48,1447.01 2861.48,1966.48 3020,2125 3020,2155 3052.65,2187.65 3052.65,2517.65 3090,2555 3217.48,2555 3237.48,2575 3237.48,2677.01 3352.48,2792.01 3352.48,2977.01 3305.48,3024.01 ; 3299.48,3031.01 3301.48,4175.01 3349.48,4215.01 3475.48,4216.01 ; J10.2 3481.43,4221.96 3475.48,4216.01 ; J12.2 3907.11,4218.56 3909.65,4216.01 ; J9.2 4434.8,4439.16 4431.65,4436.01 ; J8.2 4852.3,4442.2 4858.48,4436.01 ; J13.TERM1 5440.43,3109.01 5341.48,3109.01 5271.48,3039.01 5128.48,3039.01 5078.48,3089.01 5078.48,3250 5078.48,3533.01 5290.48,3745.01 5290.48,4025.01 5239.48,4164.01 5131.48,4299.01 4985.48,4411.01 4858.48,4436.01 ; 3475.48,4216.01 3909.65,4216.01 ; 3909.65,4216.01 4043.48,4216.01 4087.48,4258.01 4087.48,4358.01 4164.48,4435.01 4422.48,4436.01 4431.65,4436.01 ; 4431.65,4436.01 4858.48,4436.01
pads on no net: J2.M1 J2.M2 J3.M1 J3.M2 J4.M1 J4.M2 J5.M1 J5.M2 J6.M1 J6.M2 J7.M1 J7.M2 J11.M1 J11.M2 J14.1 J14.P$4 J14.P$5 J14.P$7 J14.P$8 J14.P$9 J14.P$10

## Polygon pours and split planes (outlines as drawn)
GND on Top "Plane 1 GND (Neg)" (solid, remove dead copper, pour order 0): 5823.48,4779.01 5823.48,967.01 911.48,967.01 911.48,4779.01
GND on Bottom "Bottom-GND" (solid, remove dead copper, pour order 2): 5823.48,967.01 5823.48,4779.01 911.48,4779.01 911.48,967.01
GND on Signal Layer 1 "Sig1GND" (solid, remove dead copper, pour order 4): 3145,2360 3145,2260 3110,2260 3065,2215 3025,2175 3025,2155 3025,2110 3000,2085 2950,2035 2950,1995 2915,1995 2900,1980 2900,1955 2915,1940 2950,1940 2950,1790 2910,1790 2900,1780 2900,1760 2910,1750 2950,1750 2950,1615 2935,1600 2925,1590 2925,1570 2925,1485 3000,1410 3135,1275 3135,970 3130,965 5960,965 5960,2945 5975,2960 5960,2975 4550,2975 4525,2975 4140,2590 3910,2360 3400,2360
VCC on Signal Layer 1 "Sig1Vcc" (solid, remove dead copper, pour order 6): 900,1000 900,4800 5900,4800 5900,3000 5900,1000
GND on Signal Layer 2 "Sig1GND" (solid, remove dead copper, pour order 8): 900,1000 900,4800 5900,4800 5900,3000 5900,1000

## Keep-outs
Keep-Out Layer:
  lines w6: 1000,1742.61 cw(c1046.48,1761.02) 1037.8,1810.25 ; 1000.14,1742.5 ccw(c3855.42,2873) 1146.47,1426.54 ; 1037.48,1810.01 1580.48,1906.01 ; 1146.61,1426.65 ccw(c1424.49,1575.02) 1407.69,1260.46 ; 1407.72,1260.99 ccw(c2049.51,10214.05) 2673.2,1259.71 2682.03,1259.71 ; 1579.8,1906.25 cw(c1588.48,1857.01) 1638.48,1857.01 1638.48,1521.01 ccw(c1688.48,1521.01) 1688.48,1471.01 2754.48,1471.01 ccw(c2754.48,1521.01) 2804.48,1521.01 2804.48,2238.01 cw(c2854.48,2238.01) 2854.48,2288.01 2974.48,2288.01 ccw(c2974.48,2338.01) 3024.48,2338.01 3024.48,2688.01 cw(c3074.48,2688.01) 3083.17,2737.25 ; 2682.09,1259.66 cw(c2975.08,-3209.35) 3867.87,1179.36 ; 3040.65,4305.95 3200.65,4169.95 ; 3041.01,4306.37 cw(c3104.65,4380.95) 3101.65,4478.95 ccw(c2977.15,8935.93) 3872.82,4568.1 3871.92,4568.1 4746.48,4746.01 ; 3083.52,2737.11 ccw(c3107.48,2873.01) 3225.15,2945.12 ; 3200.86,4170.2 cw(c3168.65,4131.96) 3218.65,4131.95 ; 3218.65,4132.25 3217.66,2980 3217.48,2979.82 3217.48,2971.01 ccw(c3267.47,2971.02) 3224.85,2944.89 ; 3867.95,1179.73 4716.04,1007.2 ; 4630.79,2797.15 cw(c4592.48,2765.02) 4642.48,2765.01 ; 4630.79,2948.87 ccw(c4592.48,2981) 4642.48,2981.01 ; 4630.96,2797.32 cw(c4721.48,2873.01) 4631.09,2948.86 ; 4642.65,2764.25 4923.65,2764.25 4923.65,2463.25 4983.65,2403.25 ; 4642.65,2981.25 4923.65,2981.25 4923.65,3291.25 4983.65,3351.25 ; 4676.4,1341.66 ccw(c4670.49,1292.01) 4670.48,1342.01 4202.48,1342.01 cw(c4202.48,1392.01) 4152.48,1392.01 4152.48,1512.01 ccw(c4102.48,1512.01) 4102.48,1562.01 3385.48,1562.01 cw(c3385.48,1612.01) 3335.48,1612.01 3335.48,2646.01 cw(c3385.48,2646.01) 3385.48,2696.01 4004.48,2696.01 4004.48,3050.01 3385.48,3050.01 cw(c3385.48,3100.01) 3335.48,3100.01 3335.48,4134.01 cw(c3385.48,4134.01) 3385.48,4184.01 4102.48,4184.01 ccw(c4102.48,4234.01) 4152.48,4234.01 4152.48,4355.01 cw(c4202.48,4355.01) 4202.48,4405.01 4670.48,4405.01 ccw(c4670.41,4455.01) 4676.4,4405.37 ; 4676.86,1341.62 ccw(c4737.49,1850.02) 5243.86,1925.69 ; 4676.86,4405.41 cw(c4737.49,3897.01) 5243.86,3821.34 ; 4715.95,1006.83 ccw(c4886.49,1695.01) 5544.22,1430.31 5549.54,1445.18 ccw(c1965.49,2873.02) 5548.87,4302.55 5543.86,4316.61 ccw(c4886.49,4051.02) 4746.35,4746.03 ; 4983.72,2402.95 cw(c4956.48,2361.02) 5006.48,2361.01 5006.48,2018.01 ccw(c5056.48,2018.01) 5056.48,1968.01 5193.48,1968.01 cw(c5193.48,1918) 5242.94,1925.4 ; 4983.72,3351.08 ccw(c4956.49,3393) 5006.48,3393.01 5006.48,3729.01 cw(c5056.48,3729.01) 5056.48,3779.01 5193.48,3779.01 ccw(c5193.48,3829.02) 5242.94,3821.62

## Other copper
Top:
  text "Top" at 4031,3330 h60 r90
Signal Layer 1:
  text "Sig1 (Pos)" at 4246,3330 h60 r90
Bottom:
  text "Bot" at 4351,3335 h60 r90
Multi-Layer:
  text "MultiLayer" at 4756,3340 h60 r90

## Silkscreen, mask and mechanical layers (free items; w line width, h text height)
Top Overlay:
  lines w6: 5050,2040 5050,2070 ; 5050,2115 5050,2145 ; 5055,2030 5085,2030 ; 5055,2080 5085,2080 ; 5055,2105 5085,2105 ; 5055,2155 5085,2155 ; 5090,2040 5090,2070 ; 5090,2115 5090,2145 ; 5095,2030 5125,2030 ; 5095,2080 5125,2080 ; 5095,2105 5125,2105 ; 5095,2155 5125,2155 ; 5130,2040 5130,2070 ; 5130,2115 5130,2145 ; 5155,2015 5155,2165
  text "MOT1" at 4875,4635 h50
  text "F1-ENC" at 5265,4545 h50 r312
  text "MOT2" at 4040,4535 h50
  text "MOT3" at 3490,4430 h50
  text "MOTPS" at 3870,4430 h50
  text "G V D C" at 5350,3975 h46.5 r286
  text "F1-TAK" at 5615,3725 h50 r287
  text "Top Overlay" at 3796,3330 h60 r90
  text "RHR Reflex Beta" at 4975,2567 h39.1 r90
  text "Interface Board vF" at 5025,2507 h39.1 r90
  text "U2" at 5097,2210 h77.5 r90
  text "F2-TAK" at 5250,1990 h50
  text "C D V G" at 5353.65,1750.25 h46.5 r74
  text "M23" at 5188.15,1566.42 h46.5 r320
  text "M12" at 5156.81,1534.57 h46.5 r320
  text "SC" at 5140,1490 h46.5 r320
  text "C D V G" at 1166.65,1461.25 h46.5 r90
  text "V" at 5115,1445 h46.5 r320
  text "G" at 5080,1415 h46.5 r320
  text "NSS" at 5029.32,1396.94 h46.5 r320
  text "<--- F3-ENC" at 2125,1355 h50
  text "<--- F3-TAK" at 2125,1285 h50
  text "F2-ENC" at 5290,1150 h50 r48
Top Paste:
  text "Top Paste" at 3691,3330 h60 r90
Top Solder:
  text "Top Solder" at 3926,3330 h60 r90
Bottom Solder:
  text "Bot Solder" at 4456,3335 h60 r90
Dimension:
  circle w6: c1119.48,1731.01 r57
  circle w6: c5626.48,2086.01 r57
  circle w6: c2890.48,2184.01 r57
  circle w6: c4721.48,2873.01 r57
  circle w6: c3104.65,4380.95 r57
  lines w6: 1000,1742.61 cw(c1046.48,1761.02) 1037.8,1810.25 ; 1000.14,1742.5 ccw(c3855.42,2873) 1146.47,1426.54 ; 1037.48,1810.01 1580.48,1906.01 ; 1146.61,1426.65 ccw(c1424.49,1575.02) 1407.69,1260.46 ; 1407.72,1260.99 ccw(c2049.51,10214.05) 2673.2,1259.71 ; 1579.8,1906.25 cw(c1588.48,1857.01) 1638.48,1857.01 1638.48,1521.01 ccw(c1688.48,1521.01) 1688.48,1471.01 2754.48,1471.01 ccw(c2754.48,1521.01) 2804.48,1521.01 2804.48,2238.01 cw(c2854.48,2238.01) 2854.48,2288.01 2974.48,2288.01 ccw(c2974.48,2338.01) 3024.48,2338.01 3024.48,2688.01 cw(c3074.48,2688.01) 3083.17,2737.25 ; 2670.47,1258.88 cw(c2975.08,-3209.35) 3875.63,1177.78 ; 3040.65,4305.95 3200.65,4169.95 ; 3041.01,4306.37 cw(c3104.65,4380.95) 3101.65,4478.95 ccw(c2977.15,8935.93) 3872.82,4568.1 ; 3083.52,2737.11 ccw(c3107.48,2873.01) 3225.15,2945.12 ; 3200.86,4170.2 cw(c3168.65,4131.96) 3218.65,4131.95 ; 3217.48,2971.01 ccw(c3267.47,2971.02) 3224.85,2944.89 ; 3217.65,2972.25 3218.65,4132.25 ; 3264.17,4486.31 ccw(c2976.49,8935.01) 3872.89,4568.07 ; 3867.95,1179.73 4746.48,1001.01 ; 3871.48,4568.01 4746.48,4746.01 ; 4630.79,2797.15 cw(c4592.48,2765.02) 4642.48,2765.01 ; 4630.79,2948.87 ccw(c4592.48,2981) 4642.48,2981.01 ; 4630.96,2797.32 cw(c4721.48,2873.01) 4631.09,2948.86 ; 4642.65,2764.25 4923.65,2764.25 4923.65,2463.25 4983.65,2403.25 ; 4642.65,2981.25 4923.65,2981.25 4923.65,3291.25 4983.65,3351.25 ; 4676.4,1341.66 ccw(c4670.49,1292.01) 4670.48,1342.01 4202.48,1342.01 cw(c4202.48,1392.01) 4152.48,1392.01 4152.48,1512.01 ccw(c4102.48,1512.01) 4102.48,1562.01 3385.48,1562.01 cw(c3385.48,1612.01) 3335.48,1612.01 3335.48,2646.01 cw(c3385.48,2646.01) 3385.48,2696.01 4004.48,2696.01 4004.48,3050.01 3385.48,3050.01 cw(c3385.48,3100.01) 3335.48,3100.01 3335.48,4134.01 cw(c3385.48,4134.01) 3385.48,4184.01 4102.48,4184.01 ccw(c4102.48,4234.01) 4152.48,4234.01 4152.48,4355.01 cw(c4202.48,4355.01) 4202.48,4405.01 4670.48,4405.01 ccw(c4670.41,4455.01) 4676.4,4405.37 ; 4676.86,1341.62 ccw(c4737.49,1850.02) 5243.86,1925.69 ; 4676.86,4405.41 cw(c4737.49,3897.01) 5243.86,3821.34 ; 4746.35,1000 ccw(c4886.49,1695.01) 5543.86,1429.42 ; 4746.35,4746.03 cw(c4886.49,4051.02) 5543.86,4316.61 ; 4983.72,2402.95 cw(c4956.48,2361.02) 5006.48,2361.01 5006.48,2018.01 ccw(c5056.48,2018.01) 5056.48,1968.01 5193.48,1968.01 cw(c5193.48,1918) 5242.94,1925.4 ; 4983.72,3351.08 ccw(c4956.49,3393) 5006.48,3393.01 5006.48,3729.01 cw(c5056.48,3729.01) 5056.48,3779.01 5193.48,3779.01 ccw(c5193.48,3829.02) 5242.94,3821.62 ; 5542.56,1427.78 ccw(c1965.49,2873.02) 5545.08,4312
  text "CUTOUT" at 4432.4,4362.82 h27.2
  text "CUTOUT" at 3692.4,4142.82 h27.2
  text "CUTOUT" at 3373.67,3722.93 h27.2 r90
  text "CUTOUT" at 4994.48,3559.01 h27.2 r90
  text "CUTOUT" at 3658.48,3061.01 h27.2
  text "CUTOUT" at 4042.67,2807.93 h27.2 r90
  text "CUTOUT" at 3677.4,2657.82 h27.2
  text "CUTOUT" at 3372.67,2087.93 h27.2 r90
  text "CUTOUT" at 4994.48,2054.01 h27.2 r90
  text "CUTOUT" at 3633.48,1571.01 h27.2
  text "CUTOUT" at 4488.48,1351.01 h27.2
Outline:
  lines w6: 1000,1742.61 cw(c1046.48,1761.02) 1037.8,1810.25 ; 1000.14,1742.5 ccw(c3855.42,2873) 1146.47,1426.54 ; 1037.48,1810.01 1580.48,1906.01 ; 1146.61,1426.65 ccw(c1424.49,1575.02) 1407.69,1260.46 ; 1407.72,1260.99 ccw(c2049.51,10214.05) 2673.2,1259.71 2682.03,1259.71 ; 1579.8,1906.25 cw(c1588.48,1857.01) 1638.48,1857.01 1638.48,1521.01 ccw(c1688.48,1521.01) 1688.48,1471.01 2754.48,1471.01 ccw(c2754.48,1521.01) 2804.48,1521.01 2804.48,2238.01 cw(c2854.48,2238.01) 2854.48,2288.01 2974.48,2288.01 ccw(c2974.48,2338.01) 3024.48,2338.01 3024.48,2688.01 cw(c3074.48,2688.01) 3083.17,2737.25 ; 2682.09,1259.66 cw(c2975.08,-3209.35) 3867.87,1179.36 ; 3040.65,4305.95 3200.65,4169.95 ; 3041.01,4306.37 cw(c3104.65,4380.95) 3101.65,4478.95 ccw(c2977.15,8935.93) 3872.82,4568.1 3871.92,4568.1 4746.48,4746.01 ; 3083.52,2737.11 ccw(c3107.48,2873.01) 3225.15,2945.12 ; 3200.86,4170.2 cw(c3168.65,4131.96) 3218.65,4131.95 ; 3218.65,4132.25 3217.66,2980 3217.48,2979.82 3217.48,2971.01 ccw(c3267.47,2971.02) 3224.85,2944.89 ; 3867.95,1179.73 4716.04,1007.2 ; 4715.95,1006.83 ccw(c4886.49,1695.01) 5544.22,1430.31 5549.54,1445.18 ccw(c1965.49,2873.02) 5548.87,4302.55 5543.86,4316.61 ccw(c4886.49,4051.02) 4746.35,4746.03
  text "Outline" at 4551,3340 h60 r90
BoardCutout:
  lines w6: 4630.79,2797.15 cw(c4592.48,2765.02) 4642.48,2765.01 ; 4630.79,2948.87 ccw(c4592.48,2981) 4642.48,2981.01 ; 4630.96,2797.32 cw(c4721.48,2873.01) 4631.09,2948.86 ; 4642.65,2764.25 4923.65,2764.25 4923.65,2463.25 4983.65,2403.25 ; 4642.65,2981.25 4923.65,2981.25 4923.65,3291.25 4983.65,3351.25 ; 4676.4,1341.66 ccw(c4670.49,1292.01) 4670.48,1342.01 4202.48,1342.01 cw(c4202.48,1392.01) 4152.48,1392.01 4152.48,1512.01 ccw(c4102.48,1512.01) 4102.48,1562.01 3385.48,1562.01 cw(c3385.48,1612.01) 3335.48,1612.01 3335.48,2646.01 cw(c3385.48,2646.01) 3385.48,2696.01 4004.48,2696.01 4004.48,3050.01 3385.48,3050.01 cw(c3385.48,3100.01) 3335.48,3100.01 3335.48,4134.01 cw(c3385.48,4134.01) 3385.48,4184.01 4102.48,4184.01 ccw(c4102.48,4234.01) 4152.48,4234.01 4152.48,4355.01 cw(c4202.48,4355.01) 4202.48,4405.01 4670.48,4405.01 ccw(c4670.41,4455.01) 4676.4,4405.37 ; 4676.86,1341.62 ccw(c4737.49,1850.02) 5243.86,1925.69 ; 4676.86,4405.41 cw(c4737.49,3897.01) 5243.86,3821.34 ; 4983.72,2402.95 cw(c4956.48,2361.02) 5006.48,2361.01 5006.48,2018.01 ccw(c5056.48,2018.01) 5056.48,1968.01 5193.48,1968.01 cw(c5193.48,1918) 5242.94,1925.4 ; 4983.72,3351.08 ccw(c4956.49,3393) 5006.48,3393.01 5006.48,3729.01 cw(c5056.48,3729.01) 5056.48,3779.01 5193.48,3779.01 ccw(c5193.48,3829.02) 5242.94,3821.62
  text "Cutout" at 4656,3340 h60 r90
  text "PLEASE MAKE SURE / THIS SECTION IS / CUTOUT FROM THE BOARD" at 4435,1830 h60 r90
tDocu:
  lines w1: 4335.48,1187.01 4502.48,1129.01
Unrouted:
  lines w0: 5473.48,1872.25 5474.48,1890.01

## Text inside footprints (layer, text, board x,y; h text height)
J1: Top Overlay "36" at 3215.04,2534.3 h77.5 r270; Top Overlay "2" at 3215.86,1487.39 h77.5 r270; Top Overlay "35" at 3089.86,2534.39 h77.5 r270; Top Overlay "1" at 3089.86,1487.39 h77.5 r270; tDocu "36" at 3215.86,2534.39 h77.5 r270; tDocu "2" at 3215.86,1487.39 h77.5 r270; tDocu "35" at 3089.86,2534.39 h77.5 r270; tDocu "1" at 3089.86,1487.39 h77.5 r270
J2: tDocu "1" at 5583.34,3803.96 h49.6 r287
J3: tDocu "1" at 5491.11,1640.4 h49.6 r253
J4: tDocu "1" at 1289.29,1399.63 h49.6 r270
J5: tDocu "1" at 5420.23,4227.79 h49.6 r312
J6: tDocu "1" at 5140.83,1210.8 h49.6 r228
J7: tDocu "1" at 1509.16,1386.11 h49.6 r270
J11: tDocu "1" at 1910.13,1372.8 h49.6